# Altium PCB 圆度测量.PcbDoc
Units mil, origin at the board's own origin, x right, y up, seen from the top; angles counter-clockwise.
Board outline 5255.03 x 3665.03 mil, 2 copper layers (Top Layer, Bottom Layer); 81 components, 59 nets, 335 pads, 46 vias.
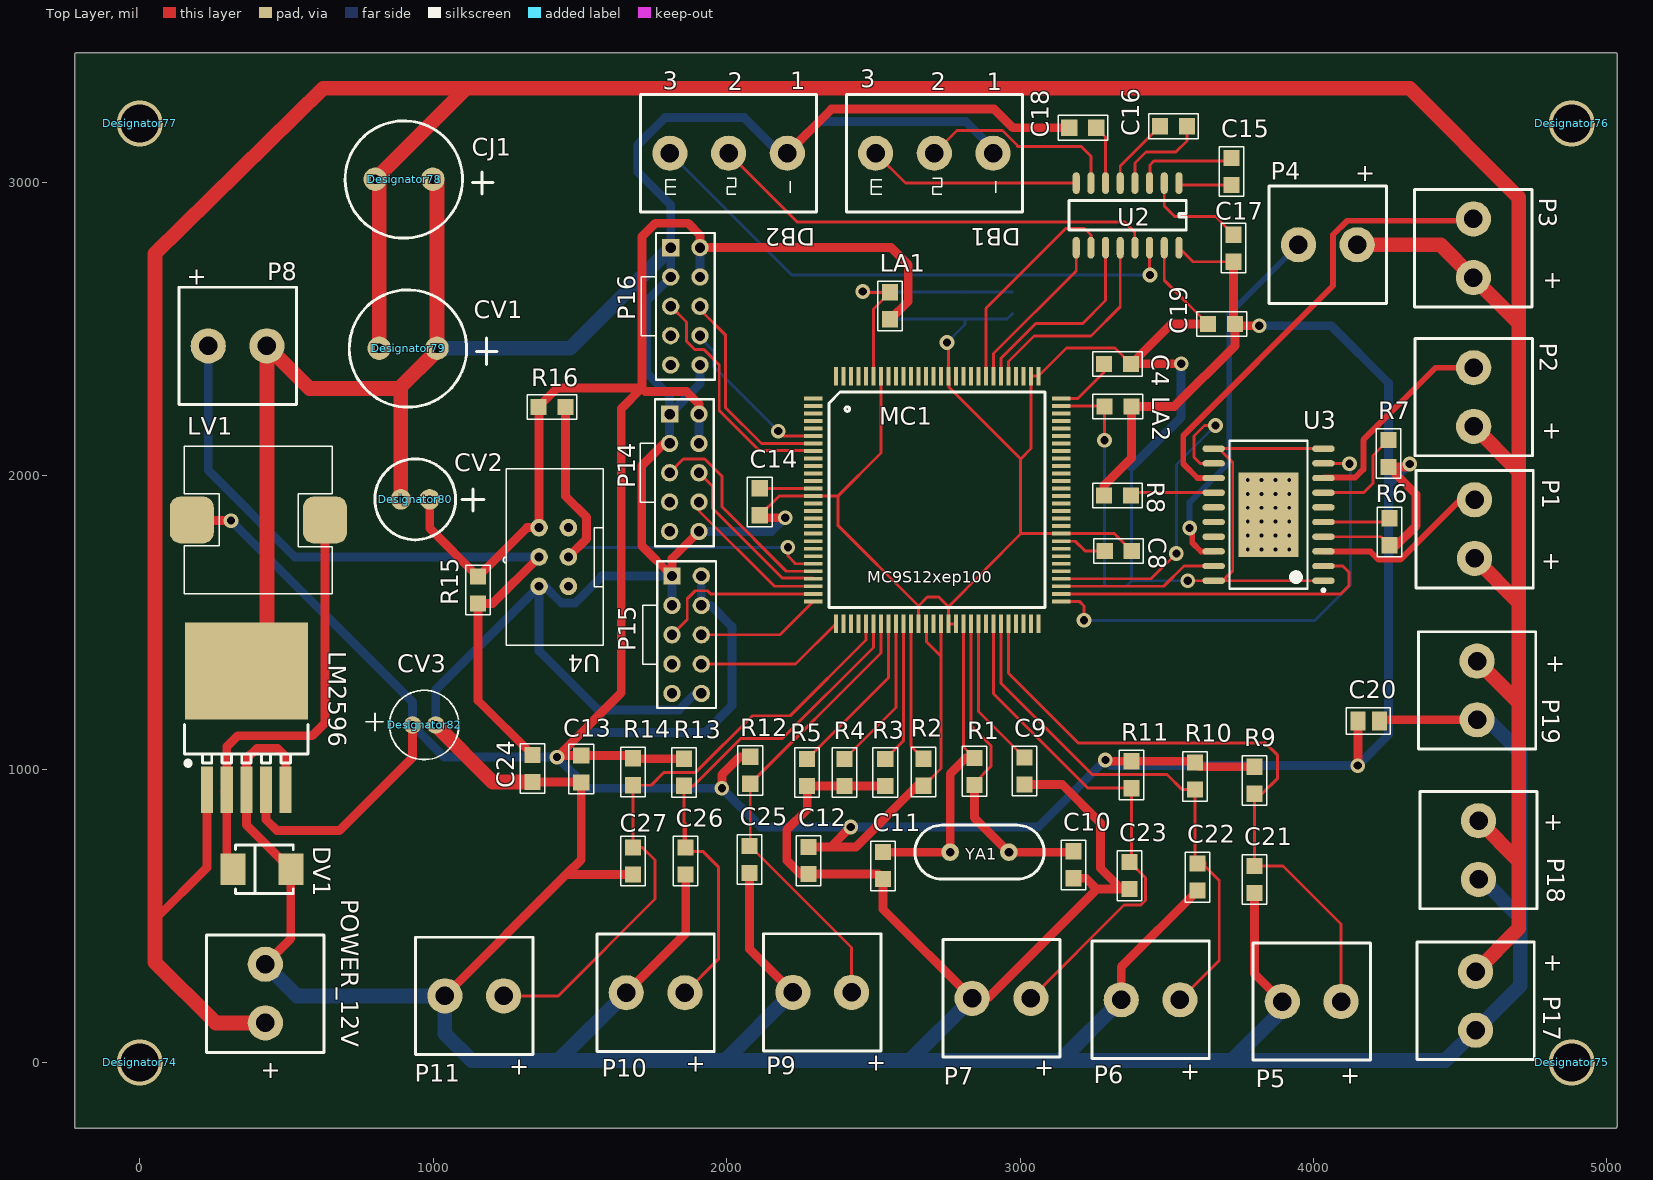
[diagram p0: Top Layer view]
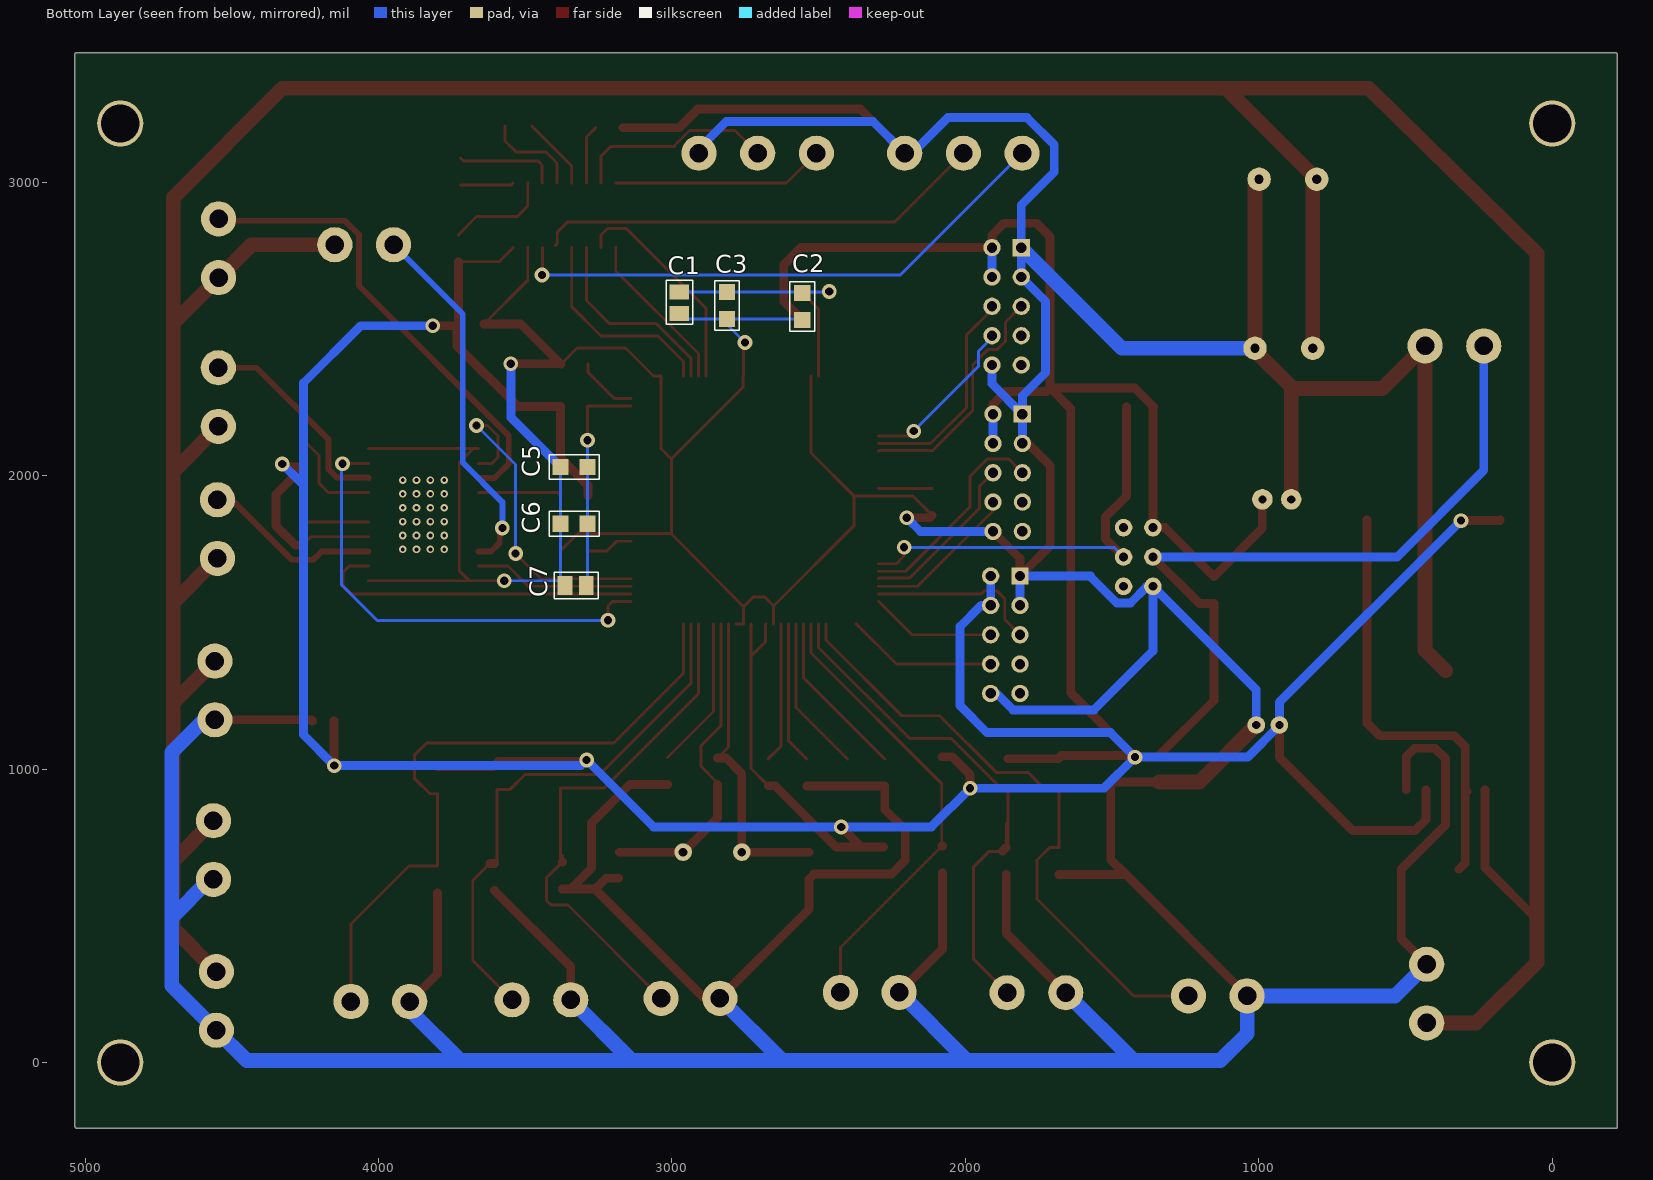
[diagram p1: Bottom Layer view, seen from below]

## Layer stack, top to bottom
Top Layer: signal copper 1.4
Dielectric: dielectric 12.6, FR-4, Dk 4.8
Bottom Layer: signal copper 1.4

## Board outline
-220.67,-222.39 ccw(c-218.16,-222.39) -218.16,-224.9 5028.84,-224.9 ccw(c5028.84,-222.39) 5031.36,-222.39 ccw(c5028.84,-222.39) 5031.3,-221.84 ccw(c5031.84,-219.39) 5034.36,-219.39 5034.36,3437.61 ccw(c5031.84,3437.61) 5031.84,3440.13 -218.16,3440.13 ccw(c-218.16,3437.61) -220.67,3437.61

## Design rules (kind name [scope] priority, off if disabled: settings)
Clearance [All] p1: gap=12
HoleSize [All] p1: absolutevalues=TRUE maxlimit=150 minlimit=1 maxpercent=80.000 minpercent=20.000
MinimumSolderMaskSliver [All] p1: minsoldermaskwidth=1
PolygonConnect [All] p1: connectstyle=Relief reliefconductorwidth=10 reliefentries=4 polygonreliefangle="90 Angle"
RoutingVias [All] p1: holewidth=28 width=40 viastyle="Through Hole" minholewidth=10 minwidth=20 maxholewidth=50 maxwidth=70
ShortCircuit [All] p1: allowed=TRUE
SilkToSilkClearance [All] p1: silktosilkclearance=1
SilkscreenOverComponentPads [All] p1: minsilkscreentomaskgap=0
SolderMaskExpansion [All] p1: expansion=4
Width [All] p1: maxlimit=50 minlimit=10 preferedwidth=10
23 further rules are at their usual default settings.

## Classes and differential pairs
component class SHEET1-胡晓: C1 C2 C3 C4 C5 C6 C7 C8 C9 C10 C11 C12 C13 C14 C15 C16 C17 C18 C19 C20 C21 C22 C23 C24 C25 C26 C27 DB1 DB2 DV1 LA1 LA2 LM2596 LV1 MC1 P1 P2 P3 P4 P5 P6 P7 P8 P9 P10 P11 P14 P15 P16 P17 P18 P19 POWER_12V R1 R2 R3 R4 R5 R6 R7 R8 R9 R11 R12 R13 R14 R15 R16 U2 U3 U4 YA1

## Components (designator, comment, footprint, x,y, rotation, side; value= is the part's Value field where it differs from the comment)
C1 "CA14" LC0805-有方向的电容 2974.84,2625.61 r270 bottom
C2 "CA13" 0805 2555.84,2622.61 r180 bottom
C3 "CA12" 0805 2812.46,2533.77 r0 bottom
C4 "CA11" 0805 3378.46,2379.77 r270 top
C5 "CA8" 0805 3379.46,2028.77 r90 bottom
C6 "CA9" 0805 3379.46,1835.77 r90 bottom
C7 "CA10" LC0805-有方向的电容 3291.84,1625.61 r0 bottom
C8 "CA7" 0805 3288.84,1742.61 r90 top
C9 "CA6" 0805 3014.84,1039.61 r0 top
C10 "CA5" 0805 3181.84,719.61 r0 top
C11 "CA4" 0805 2532.84,716.61 r0 top
C12 "CA3" 0805 2278.46,733.77 r0 top
C13 "CA2" 0805 1504.46,953.77 r180 top
C14 "CA1" 0805 2112.84,1956.61 r0 top
C15 "104" 0805 3720.84,3082.61 r0 top
C16 "104" 0805 3476.84,3190.61 r90 top
C17 "104" 0805 3727.84,2728.61 r180 top
C18 "104" 0805 3167.84,3185.61 r90 top
C19 "104" 0805 3640.84,2516.61 r90 top
C20 "C20" LC0805-有方向的电容 4151.84,1163.61 r0 top
C21 "0.1uF" 0805 3798.84,669.61 r0 top
C22 "0.1uF" 0805 3604.84,677.61 r0 top
C23 "0.1uF" 0805 3372.84,682.61 r0 top
C24 "Cap" 0805 1338.84,1047.61 r0 top
C25 "0.1uF" 0805 2078.46,737.77 r0 top
C26 "0.1uF" 0805 1860.46,732.77 r0 top
C27 "0.1uF" 0805 1680.46,732.77 r0 top
DB1 "DB1" kf128-3P 2907.84,3098.61 r180 top
DB2 "DB2" kf128-3P 2206.84,3098.61 r180 top
Designator74 "Comment" 穿孔#1 -3.16,3.61 r180 top
Designator75 "Comment" 穿孔#2 4878.84,-35.39 r180 top
Designator76 "Comment" 穿孔#3 4819.84,3195.61 r180 top
Designator77 "Comment" 穿孔#4 -5.16,3195.61 r180 top
Designator78 "Comment" 50V/330uF 999,3010 r270 top
Designator79 "Comment" 470uF 1013,2434 r270 top
Designator80 "Comment" 10V/330uF 963,1929 r270 top
Designator82 "Comment" 35V/10uF 970,1150 r90 top
DV1 "Diode" SMB-二极管 319.84,663.61 r0 top
LA1 "LA2" 0805 2556.84,2624.61 r0 top
LA2 "LA1" 0805 3379.46,2235.77 r270 top
LM2596 "LM2596_5" LM2596 363.46,1334.77 r270 top
LV1 "Inductor" 47uH 177.46,1848.77 r0 top
MC1 "UA1" mc9s12xep100 2709.46,1926.77 r0 top
P1 "LED1" KF128-2p 4548.84,1717.61 r90 top
P2 "LED2" KF128-2p 4545.84,2167.61 r90 top
P3 "LED3" KF128-2p 4544.84,2674.61 r90 top
P4 "蜂鸣器" KF128-2p 4148.84,2786.61 r180 top
P5 "按键" KF128-2p 3893.84,207.61 r0 top
P6 "按键" KF128-2p 3344.84,213.61 r0 top
P7 "按键" KF128-2p 2836.84,218.61 r0 top
P8 "复位开关" KF128-2p 233.46,2441.77 r0 top
P9 "中断" KF128-2p 2225.84,238.61 r0 top
P10 "中断" KF128-2p 1657.84,237.61 r0 top
P11 "中断" KF128-2p 1039.84,226.61 r0 top
P14 "Header 5X2" 插针5x5 1805.84,2209.61 r0 top
P15 "Header 5X2" 插针5x5 1813.84,1657.61 r0 top
P16 "Header 5X2" 插针5x5 1809.46,2776.77 r0 top
P17 "12V供电" KF128-2p 4552.46,109.77 r90 top
P18 "12V供电" KF128-2p 4562.46,623.77 r90 top
P19 "12V供电" KF128-2p 4557.46,1167.77 r90 top
POWER_12V "Header 2" KF128-2p 427.84,334.61 r270 top
R1 "RA8" 0805 2844.46,945.77 r180 top
R2 "RA2" 0805 2671.46,942.77 r180 top
R3 "RA2" 0805 2540.46,941.77 r180 top
R4 "RA2" 0805 2401.46,941.77 r180 top
R5 "RA2" 0805 2274.46,941.77 r180 top
R6 "10K" 0805 4258.84,1854.61 r0 top
R7 "10K" 0805 4255.84,2121.61 r0 top
R8 "10K" 0805 3285.84,1931.61 r90 top
R9 "10K" 0805 3798.84,1007.61 r0 top
R10 "10K" 0805 3595.84,1021.61 r0 top
R11 "10K" 0805 3379.84,1026.61 r0 top
R12 "10K" 0805 2080.46,1041.77 r0 top
R13 "10K" 0805 1854.46,1034.77 r0 top
R14 "10K" 0805 1681.46,1036.77 r0 top
R15 "Res2" 0805 1152.84,1563.61 r180 top
R16 "Res2" 0805 1358.84,2233.61 r90 top
U2 "MAX3232C" MAX232 3541.46,2996.77 r0 top
U3 "TLE8104" TEL8104 4033.84,1641.61 r180 top
U4 "BDM" BDM 1460.84,1622.61 r270 top
YA1 "YA1" XTAL 2733.84,716.61 r0 top

## Footprints (in the part's own frame and the unit in brackets; to place one, negate y for a bottom-side part, rotate by r counter-clockwise, add the part's x,y. Pads: shape width x height; smd on the part's side, far side on the other; paste and mask are expansions set on the pad)
10V/330uF [mil]
  round 70 hole 27.56: 1(10,25) 2(10,-73.43)
  silkscreen extent -128,-162 148,210
35V/10uF [mil]
  round 60 hole 27.56: 1(0,40) 2(0,-38.74)
  silkscreen extent -118,-117 118,200
47uH [mil]
  rrect50% 150x160.48 smd mask+0: 0(0,0) 1(454.09,0)
  silkscreen extent -25,-252 479,252
50V/330uF [mil]
  round 80 hole 31.5: 1(0,0) 2(0,-196.85)
  silkscreen extent -199,-299 201,205
470uF [mil]
  round 80 hole 31.5: 1(0,0) 2(0,-196.85)
  silkscreen extent -199,-299 201,205
0805 [mil]
  rect 55x55 smd: 1(0,-92) 2(0,0)
  silkscreen extent -42,-131 42,38
BDM [mil]
  round 60 hole 30: 1(0,0) 2(0,-100) 3(-100,0) 4(-100,-100) 5(-200,0) 6(-200,-100)
  silkscreen extent -400,-222 200,118
KF128-2p [mil]
  round 120 hole 62.99: 1(0,0) 2(200,0)
  silkscreen extent -100,-200 300,200
kf128-3P [mil]
  round 120 hole 62.99: 1(0,0) 2(200,0) 3(400,0)
  silkscreen extent -100,-200 500,200
LC0805-有方向的电容 [mm]
  rect 1.287x1.673 smd: 1(0,0) 2(1.85,0)
  silkscreen extent -1.02,-1.14 2.79,1.14
LM2596 [mm]
  rect 8.4x10.65 smd: 0(0,0)
  rect 4x1.05 smd: 1(10.3,-3.4) 2(10.3,-1.7) 3(10.3,0) 4(10.3,1.7) 5(10.3,3.4)
  silkscreen extent 4.65,-5.35 8.2,5.35
MAX232 [mil]
  oval 24x74 smd: 1(0,0) 2(-50,0) 3(-100,0) 4(-150,0) 5(-200,0) 6(-250,0) 7(-300,0) 8(-350,0) 9(-350,-220) 10(-300,-220) 11(-250,-220) 12(-200,-220) 13(-150,-220) 14(-100,-220) 15(-50,-220) 16(0,-220)
  silkscreen extent -375,-160 25,-60
mc9s12xep100 [mm]
  rect 1.6x0.34 smd: 1(-10.511,8.528) 2(-10.511,7.878) 3(-10.511,7.228) 4(-10.511,6.578) 5(-10.511,5.928) 6(-10.511,5.278) 7(-10.511,4.628) 8(-10.511,3.978) 9(-10.511,3.328) 10(-10.511,2.678) 11(-10.511,2.028) 12(-10.511,1.378) 13(-10.511,0.728) 14(-10.511,0.078) 15(-10.511,-0.572) 16(-10.511,-1.222) 17(-10.511,-1.872) 18(-10.511,-2.522) 19(-10.511,-3.172) 20(-10.511,-3.822) 21(-10.511,-4.472) 22(-10.511,-5.122) 23(-10.511,-5.772) 24(-10.511,-6.422) 25(-10.511,-7.072) 26(-10.511,-7.722) 27(-10.511,-8.372) 28(-10.511,-9.022) 57(10.939,-9.022) 58(10.939,-8.372) 59(10.939,-7.722) 60(10.939,-7.072) 61(10.939,-6.422) 62(10.939,-5.772) 63(10.939,-5.122) 64(10.939,-4.472) 65(10.939,-3.822) 66(10.939,-3.172) 67(10.939,-2.522) 68(10.939,-1.872) 69(10.939,-1.222) 70(10.939,-0.572) 71(10.939,0.078) 72(10.939,0.728) 73(10.939,1.378) 74(10.939,2.028) 75(10.939,2.678) 76(10.939,3.328) 77(10.939,3.978) 78(10.939,4.628) 79(10.939,5.278) 80(10.939,5.928) 81(10.939,6.578) 82(10.939,7.228) 83(10.939,7.878) 84(10.939,8.528)
  rect 0.34x1.6 smd: 29(-8.561,-10.972) 30(-7.911,-10.972) 31(-7.261,-10.972) 32(-6.611,-10.972) 33(-5.961,-10.972) 34(-5.311,-10.972) 35(-4.661,-10.972) 36(-4.011,-10.972) 37(-3.361,-10.972) 38(-2.711,-10.972) 39(-2.061,-10.972) 40(-1.411,-10.972) 41(-0.761,-10.972) 42(-0.111,-10.972) 43(0.539,-10.972) 44(1.189,-10.972) 45(1.839,-10.972) 46(2.489,-10.972) 47(3.139,-10.972) 48(3.789,-10.972) 49(4.439,-10.972) 50(5.089,-10.972) 51(5.739,-10.972) 52(6.389,-10.972) 53(7.039,-10.972) 54(7.689,-10.972) 55(8.339,-10.972) 56(8.989,-10.972) 85(8.989,10.478) 86(8.339,10.478) 87(7.689,10.478) 88(7.039,10.478) 89(6.389,10.478) 90(5.739,10.478) 91(5.089,10.478) 92(4.439,10.478) 93(3.789,10.478) 94(3.139,10.478) 95(2.489,10.478) 96(1.839,10.478) 97(1.189,10.478) 98(0.539,10.478) 99(-0.111,10.478) 100(-0.761,10.478) 101(-1.411,10.478) 102(-2.061,10.478) 103(-2.711,10.478) 104(-3.361,10.478) 105(-4.011,10.478) 106(-4.661,10.478) 107(-5.311,10.478) 108(-5.961,10.478) 109(-6.611,10.478) 110(-7.261,10.478) 111(-7.911,10.478) 112(-8.561,10.478)
  silkscreen extent -9.14,-9.55 9.55,9.09
SMB-二极管 [mil]
  rect 85x107.99 smd: 1(195,-5) 2(-1.85,-5)
  silkscreen extent 6,-88 203,78
TEL8104 [mm]
  oval 1.95x0.55 smd: 1(0,0) 2(0,-1.27) 3(0,-2.54) 4(0,-3.81) 5(0,-5.08) 6(0,-6.35) 7(0,-7.62) 8(0,-8.89) 9(0,-10.16) 10(0,-11.43) 11(9.5,-11.43) 12(9.5,-10.16) 13(9.5,-8.89) 14(9.5,-7.62) 15(9.5,-6.35) 16(9.5,-5.08) 17(9.5,-3.81) 18(9.5,-2.54) 19(9.5,-1.27) 20(9.5,0)
  rect 5.2x7.3 smd: 21(4.75,-5.715)
  silkscreen extent -0.13,-12.11 8.13,0.95, body extent 0.95,-12.11 8.55,0.68, height 2.55
XTAL [mil]
  round 60 hole 30: 1(28,0) 2(228,0)
  silkscreen extent -92,-92 348,92
插针5x5 [mm]
  rect 1.5x1.5 hole 0.9: 1(0,0)
  round 1.5 hole 0.9: 2(2.54,0) 3(0,-2.54) 4(2.54,-2.54) 5(0,-5.08) 6(2.54,-5.08) 7(0,-7.62) 8(2.54,-7.62) 9(0,-10.16) 10(2.54,-10.16)
  silkscreen extent -2.54,-11.43 3.81,1.27
穿孔#1 [mm]
  round 4 hole 3.3: 1(-0.08,0.092)
穿孔#2 [mm]
  round 4 hole 3.3: 1(-0.029,-0.899)
穿孔#3 [mm]
  round 4 hole 3.3: 1(-1.528,-0.111)
穿孔#4 [mm]
  round 4 hole 3.3: 1(-0.131,-0.111)

## Via types
v1: diameter 25.98, hole 12.99, Top Layer to Bottom Layer, tented top, 24 vias
v2: diameter 50, hole 28, Top Layer to Bottom Layer, 22 vias

## Nets (pads, with @x,y where several pads share a name; then routed paths per layer and width w, separated by ;. In a path a pad name is that pad's centre, name@x,y a point inside that pad or via, vN(x,y) a via of type N, cw(c..) or ccw(c..) an arc to the next point about the centre after c; other vN are vias at no path point)
5V: C12.2 C13.1 C17.2 C19.1 C20.1 Designator80.1 Designator82.1 LA1.1 LA2.2 LM2596.4 LV1.0 MC1.41 MC1.43 P14.2 P14.4 P15.2 P15.4 P16.2 P16.4 R2.2 R6.1 R7.1 R8.2 R9.2 R10.2 R11.2 R12.2 R13.2 R14.2 R15.1 R16.2 U2.16 U3.4 U4.6 | length 18084.3
  Top Layer w10: R2.2@2671.46,949.77 R2.2 2730.66,1001.98 MC1.43 MC1.43@2728.77,1492.91 ; MC1.41 2681.38,1492.9 2681.38,1433.62 2730.66,1384.34 ; U2.16 3589.61,2728.61 C17.2 ; U3.4 4229.84,1791.61 R6.1
  Top Layer w30: LV1.0 179.61,1846.61 v2(310.84,1846.61) ; LM2596.4 430.39,827.61 468,790 680,790 930,1040 Designator82.1 ; Designator80.1 988,1820.46 R15.1 1319.84,1822.61 U4.6 1360.84,2231.61 R16.2 1358.84,2234.8 1422.66,2298.61 1711.31,2298.61 ; v2(1421.84,1040.61) v2@1427,1045.77 ; R13.2 1683.46,1034.77 R14.2 1672.46,1045.77 C13.1 v2@1427,1045.77 ; P14.2 1905.84,2243.61 1862.84,2286.61 1723.31,2286.61 1711.31,2298.61 ; v2(1983.84,934.61) 1983.84,980.61 2045,1041.77 R12.2 ; C12.2 2354,733.77 ; v2(2422.84,802.61) 2354,733.77 ; LA1.1 2558.03,2532.61 2618.84,2593.43 2618.84,2718.61 2560.68,2776.77 P16.2 1909.46,2819 1868.84,2859.61 1756.84,2859.61 1711.31,2814.09 1711.31,2298.61 ; R2.2 2649,942.77 2440,733.77 2354,733.77 ; R8.2 3285.84,1965.61 3379.46,2059.23 LA2.2 3526,2235.77 3732.84,2442.61 C19.1 ; v2(3290.84,1030.61) 3294.84,1026.61 R11.2 3590.84,1026.61 R10.2 3609.84,1007.61 R9.2 ; C17.2 3727.84,2521.61 C19.1 ; v2(3814.84,2510.61) 3738.84,2510.61 C19.1 ; v2(4150.84,1011.61) 4151.84,1012.61 C20.1 ; R7.1 4317.84,2029.61 v2(4327.84,2039.61) ; R6.1 4282.84,1762.61 4349.84,1829.61 4349.84,1935.61 R7.1@4258.84,2026.61 ; v2@1427,1045.77 1640.84,1259.61 1640.84,2228.14 1711.31,2298.61
  Bottom Layer w30: v2(310.84,1846.61) 930,1227.46 Designator82.1 930,1148.13 1037.52,1040.61 v2(1421.84,1040.61) ; P14.4 P14.2 ; P16.4 P16.2 ; P15.2 P15.4 1945.84,1557.61 2017.84,1485.61 2017.84,1215.61 1926.84,1124.61 1505.84,1124.61 v2(1421.84,1040.61) ; v2(3814.84,2510.61) 4060.84,2510.61 4255.84,2315.61 4255.84,1978.61 ; v2(4327.84,2039.61) 4266.84,1978.61 4255.84,1978.61 ; v2(1421.84,1040.61) 1527.84,934.61 v2(1983.84,934.61) 2115.84,802.61 v2(2422.84,802.61) 3062.84,802.61 v2(3290.84,1030.61) 3309.84,1011.61 v2(4150.84,1011.61) 4255.84,1116.61 4255.84,1978.61
12V: Designator78.2 Designator79.2 LM2596.1 P1.1 P2.1 P3.1 P4.1 P17.2 P18.2 P19.2 POWER_12V.2 | length 13701.9
  Top Layer w30: 51.84,487 229.6,664.76 LM2596.1 ; P2.1 P2.1@4576.84,2167.61 ; P19.2 P19.2@4599.68,1367.77
  Top Layer w50: POWER_12V.2 258.84,134.61 51.84,341.61 51.84,487 51.84,2755.84 624.84,3319.61 1109,3319.61 ; Designator79.2 816.15,2996 Designator78.2 1109,3316.85 1109,3319.61 ; P4.1 4432.84,2786.61 P3.1 4699.84,2519.61 ; P2.1 4694.84,2018.61 4699.84,2018.61 ; P1.1 4699.84,1566.61 ; P17.2 4699.84,457.16 4699.84,686.39 ; P19.2 4699.84,1225.39 ; P18.2 4699.84,686.39 ; 1109,3319.61 4327.84,3319.61 4699.84,2947.61 4699.84,2519.61 ; 4699.84,686.39 4699.84,1225.39 ; 4699.84,1225.39 4699.84,1566.61 ; 4699.84,1566.61 4699.84,2018.61 ; 4699.84,2018.61 4699.84,2519.61
BKGD: MC1.23 R16.1 U4.3 | length 1455.8
  Top Layer w10: v2(2208.84,1755.61) 2208.84,1725.61 2234.93,1699.53 MC1.23
  Top Layer w30: R16.1 1450.84,1929.61 1522.84,1857.61 1522.84,1784.61 U4.3
  Bottom Layer w10: U4.3 1493.84,1755.61 v2(2208.84,1755.61)
GND: C1.2 C2.1 C3.2 C4.2 C5.2 C6.2 C7.2 C8.1 C9.1 C10.1 C11.1 C12.1 C13.2 C14.1 C18.2 C19.2 C20.2 C21.1 C22.1 C23.1 C24.1 C25.1 C26.1 C27.1 DB1.1 DB2.1 Designator78.1 Designator79.1 Designator80.2 Designator82.2 DV1.1 LM2596.0 LM2596.3 LM2596.5 MC1.14 MC1.40 MC1.44 MC1.45 MC1.66 MC1.85 MC1.86 MC1.97 MC1.106 P5.1 P6.1 P7.1 P8.2 P9.1 P10.1 P11.1 P14.1 P14.3 P14.10 P15.1 P15.3 P15.10 P16.1 P16.3 P16.10 P17.1 P18.1 P19.1 POWER_12V.1 R3.2 R4.2 R5.2 U2.15 U3.1 U3.10 U3.11 U3.20 U4.2 | length 33440.3
  Top Layer w10: C13.2@1502.61,955.61 C13.2 ; C14.1 2178.07,1929.84 MC1.14 2379.07,1929.84 ; MC1.106 2525.94,2076.71 2379.07,1929.84 ; MC1.40 2653.89,1555.89 ; v2@2742.84,2453.61 2756.25,2440.2 MC1.97 2758.15,2337.4 2758.15,2300.76 3002.24,2056.67 ; MC1.45 MC1.44 2756.25,1552.75 ; P7.1 P7.1@2889.84,218.61 ; 3001.18,1800.83 2756.25,1552.75 ; C4.2 3323.61,2434.61 3158.66,2434.61 MC1.85 MC1.86 3037.75,2092.18 3002.24,2056.67 ; C8.1 3321.57,1801.89 MC1.66 3002.24,1801.89 3002.24,2056.67 ; U2.15 3491.46,2666 C19.2 ; v2(3571.84,1641.61) U3.20 ; U3.11 U3.11@3677.84,2091.61 ; U3.1 U3.20 ; U3.10 U3.11@3677.84,2091.61 ; 2379.07,1929.84 2379.07,1830.71 2653.89,1555.89 ; 2653.89,1555.89 2684,1586 2723,1586 2756.25,1552.75 ; U3.20 3690.84,1641.61 3724.84,1675.61 3724.84,2044.61 U3.11@3677.84,2091.61
  Top Layer w30: POWER_12V.1 514.84,421.61 DV1.1 363.46,810 LM2596.3 363.46,1034.46 400,1071 469,1071 497.31,1042.69 LM2596.5 ; P8.2@433.46,2404.15 P8.2 ; P11.1 1454,640.77 ; C24.1 C13.2@1502.61,955.61 ; C13.2 1504.46,691.23 1454,640.77 ; P10.1 1860.46,440.23 C26.1 ; C27.1 1454,640.77 ; P14.3 1786.84,2109.61 1710.84,2033.61 1710.84,1760.61 P15.1 1813.84,1717.61 P14.10 ; C25.1 2078.46,386 P9.1 ; C14.1 2120.84,1856.61 v2(2199.84,1856.61) ; DB2.1 2357.23,3249 2911.61,3249 2974.99,3185.61 C18.2 ; R3.2 R4.2 R5.2 2274.46,862.23 2204.84,792.61 2204.84,688.61 2251.68,641.77 C12.1 2515.68,641.77 C11.1 2532.84,522.61 P7.1 P7.1@2796.84,218.61 ; v2@2742.84,2453.61 v2(2750.84,2453.61) ; P7.1@2889.84,218.61 3261.84,590.61 ; C9.1 3142.84,947.61 3273.84,816.61 3273.84,662.61 3345.84,590.61 C23.1 3261.84,590.61 ; C10.1 3224.84,627.61 3261.84,590.61 ; P6.1 3344.84,325.61 C22.1 ; C4.2 C4.2@3379.68,2381 ; v2(3549,2381) C4.2@3379.68,2381 ; C19.2 3515.3,2516.61 C4.2@3379.68,2381 ; C21.1 3798.84,302.61 P5.1 ; C20.2 4228.83,1167.77 P19.1 P19.1@4593.68,1167.77 ; P18.1 P18.1@4574.68,623.77
  Top Layer w50: LM2596.0 433.46,1404.77 P8.2@433.46,2404.15 ; P8.2 578.23,2297 884,2297 ; Designator80.2 889.57,2291.43 884,2297 ; Designator78.1 1013,2996 Designator79.1 1013,2426 884,2297 ; Designator82.2 1203.13,955.61 C24.1
  Bottom Layer w10: C2.1 2559,2533.77 C3.2 ; v2@2742.84,2453.61 v2(2750.84,2453.61) 2812.46,2515.23 C3.2 ; C1.2 2955.83,2533.77 C3.2 ; P6.1@3314.84,213.61 P6.1 ; C7.2 C7.2@3379.46,1640.39 ; C5.2 C6.2 C7.2@3379.46,1640.39 ; v2(3571.84,1641.61) 3380.68,1641.61 C7.2@3379.46,1640.39
  Bottom Layer w30: Designator82.2 1008.74,1270.51 U4.2 ; U4.2@1380.23,1622.61 1437.23,1565.61 1484.45,1565.61 1573.62,1654.79 1573.62,1657.61 P15.1 P15.3 ; U4.2@1383.06,1622.61 U4.2 ; P14.3 P14.1 ; P14.10 2152.84,1809.61 v2(2199.84,1856.61) ; P16.10 1909.46,2313.23 P14.1 ; P15.10@1913.84,1242.61 P15.10 1893.78,1257.61 1837.26,1201.09 1561.91,1201.09 1360.84,1402.16 U4.2 ; 1996.84,6.61 1996.84,9.61 ; DB2.1@2206.84,3113.16 DB2.1 ; DB1.1 2907.84,3113.61 2814.84,3206.61 2314.84,3206.61 DB2.1 ; C5.2 3549,2198.31 v2(3549,2381) ; P5.1@3893.84,178.61 P5.1 ; P14.1 1805.84,2271.33 1726.84,2350.33 1726.84,2594.16 P16.3 P16.1 1809.46,2922 1697,3034.46 1697,3127 1790,3220 2060.23,3220 2181.61,3098.61 DB2.1
  Bottom Layer w50: POWER_12V.1 535.84,226.61 P11.1 1039.84,98.61 1131.84,6.61 1426.84,6.61 ; Designator79.1 1466.69,2434 P16.1 ; P10.1 1426.84,6.61 ; 1996.84,9.61 P9.1 ; P7.1 2624.84,6.61 ; P6.1 3137.84,6.61 ; P5.1@3893.84,178.61 3721.84,6.61 ; P18.1@4574.68,623.77 4704.84,493.61 ; P19.1@4593.68,1167.77 4704.84,1056.61 4704.84,493.61 ; 1426.84,6.61 1996.84,6.61 2624.84,6.61 ; 2624.84,6.61 3137.84,6.61 ; 3137.84,6.61 3721.84,6.61 ; 3721.84,6.61 4449.3,6.61 P17.1 4704.84,262.16 4704.84,493.61
KWH0: C21.2 MC1.52 P5.2 R9.1 | length 2268.3
  Top Layer w10: MC1.52 2960.98,1326.48 3198.34,1089.11 3832.34,1089.11 3833.84,1090.61 3877.84,1046.61 3877.84,968.61 3824.84,915.61 R9.1 C21.2 3895.84,669.61 4093.84,471.61 P5.2
KWH1: C22.2 MC1.51 P6.2 R10.1 | length 1828.6
  Top Layer w10: MC1.51 2935.39,1292.07 3245.84,981.61 3501.06,981.61 3553.06,929.61 R10.1 3595.84,686.61 C22.2 ; P6.2 3678.84,347.61 3678.84,619.61 C22.2@3620.84,677.61
  Top Layer w30: C22.2 C22.2@3620.84,677.61
KWH2: C23.2 MC1.50 P7.2 R11.1 | length 1801
  Top Layer w10: MC1.50 2909.8,1256.66 3231.84,934.61 R11.1 3379.84,689.61 C23.2 C23.2@3372.84,704.61 ; P7.2 3354.34,536.11 3411.53,536.11 3427.34,551.93 3427.34,629.3 C23.2@3374.03,682.61
  Top Layer w30: C23.2 C23.2@3374.03,682.61
KWH4: C25.2 MC1.35 P9.2 R12.1 | length 1586.1
  Top Layer w10: C25.2 2080.46,739.77 R12.1 2525.94,1395.25 MC1.35 ; C25.2@2079.64,737.77 2425.84,391.57 P9.2
  Top Layer w30: C25.2 C25.2@2079.64,737.77
KWH5: C26.2 MC1.34 P10.2 R13.1 | length 1831.5
  Top Layer w10: P10.2 1971.84,351.61 1971.84,666.61 1918.84,719.61 C26.2@1873.61,719.61 ; 1860.46,815 C26.2 1854.46,738.77 R13.1 1887,942.77 2047.84,1103.61 2189.84,1103.61 2500.35,1414.12 MC1.34
  Top Layer w30: C26.2 C26.2@1873.61,719.61
KWH6: C27.2 MC1.33 P11.2 R14.1 | length 2144.9
  Top Layer w10: P11.2 1425.84,226.61 1755.84,556.61 1755.84,689.61 1712.69,732.77 C27.2 1681.46,733.77 R14.1 1743,944.77 1786.84,988.61 1894.84,988.61 2087.84,1181.61 2216.84,1181.61 2474.76,1439.53 MC1.33
NetC1_1: C1.1 C2.2 C3.1 LA1.2 MC1.107 | length 916.7
  Top Layer w10: v2(2463.84,2627.61) 2466.84,2624.61 LA1.2 2500.35,2568.12 MC1.107
  Bottom Layer w10: v2(2463.84,2627.61) 2465.68,2625.77 C3.1 ; C3.1@2811.3,2624.61 C3.1 ; C1.1 2812.3,2625.61 C3.1
NetC4_1: C4.1 MC1.84 | length 211
  Top Layer w10: MC1.84 3196.75,2262.52 3286.46,2352.23 C4.1
NetC5_1: C5.1 C6.1 C7.1 LA2.1 MC1.83 | length 760.1
  Top Layer w10: MC1.83 3286.3,2236.93 LA2.1 3287.46,2121 v2(3287.84,2120.61)
  Bottom Layer w10: v2(3287.84,2120.61) 3287.46,2120.23 C5.1 C6.1 3287.46,1630 C7.1
NetC8_2: C8.2 MC1.65 | length 162.7
  Top Layer w10: MC1.65 3188.16,1776.3 3221.84,1742.61 C8.2
NetC9_2: C9.2 MC1.48 | length 519.9
  Top Layer w10: MC1.48 2858.61,1195.84 C9.2
NetC10_2: C10.2 MC1.47 R1.2 YA1.2 | length 1099.5
  Top Layer w10: MC1.47 2833.02,1147.43 2900.84,1079.61 2900.84,1009.16 2844.46,952.77 R1.2 ; C10.2@3178.84,716.61 C10.2
  Top Layer w30: R1.2 2844.46,834 YA1.2 C10.2@3178.84,716.61
NetC11_2: C11.2 MC1.46 R1.1 YA1.1 | length 1073.4
  Top Layer w10: MC1.46 2807.43,1074.79 R1.1
  Top Layer w30: C11.2 YA1.1 2761.84,983.61 2816,1037.77 R1.1
NetC14_2: C14.2 MC1.13 | length 183.3
  Top Layer w10: C14.2 2114.02,1955.43 MC1.13
NetC15_1: C15.1 U2.1 | length 181.9
  Top Layer w10: U2.1 3547.61,2990.61 C15.1
NetC15_2: C15.2 U2.3 | length 350.4
  Top Layer w10: U2.3 3442.84,2998.16 3442.84,3058.61 3455.84,3071.61 3709.84,3071.61 C15.2
NetC16_1: C16.1 U2.4 | length 327.1
  Top Layer w10: U2.4 3391.46,3065.23 3428.84,3102.61 3530.84,3102.61 3568.84,3140.61 C16.1
NetC16_2: C16.2 U2.5 | length 249.9
  Top Layer w10: U2.5 3341.46,3055.23 C16.2
NetC17_1: C17.1 U2.2 | length 355.5
  Top Layer w10: U2.2 3491.46,2918.61 3526.84,2883.23 3526.84,2882.61 3665.84,2882.61 C17.1
NetC18_1: C18.1 U2.6 | length 201.9
  Top Layer w10: C18.1 3291.46,3154 U2.6
NetDB1_22: DB1.2 U2.7 | length 695
  Top Layer w10: DB1.2 2784.84,3175.61 2939.74,3175.61 2990.91,3124.44 2990.91,3121.61 3208.46,3121.61 3241.46,3088.61 U2.7
NetDB1_23: DB1.3 U2.8 | length 725.8
  Top Layer w10: DB1.3 2609.68,2996.77 U2.8
NetDB2_22: DB2.2 U2.13 | length 1544.7
  Top Layer w10: DB2.2 2241.84,2863.61 3356.84,2863.61 3390.84,2829.61 3390.84,2790.57 U2.13@3398.05,2783.36
NetDB2_23: DB2.3 U2.14 | length 1901.6
  Top Layer w10: U2.14 3441.46,2685 v2(3442.84,2683.61)
  Bottom Layer w10: DB2.3 2221.84,2683.61 v2(3442.84,2683.61)
NetDV1_2: DV1.2 LM2596.2 LV1.1 | length 1496.1
  Top Layer w30: LM2596.2@289.84,922.58 LM2596.2 ; DV1.2 296.53,680.08 LM2596.2 ; LV1.1 631.55,1157.32 587.84,1113.61 333.84,1113.61 296.53,1076.3 LM2596.2
NetMC1_36: MC1.36 R5.1 | length 575.8
  Top Layer w10: R5.1 2551.53,1310.84 MC1.36
NetMC1_37: MC1.37 R4.1 | length 533.8
  Top Layer w10: R4.1 2577.12,1209.44 MC1.37
NetMC1_38: MC1.38 R3.1 | length 486.8
  Top Layer w10: R3.1 2602.71,1096.03 MC1.38
NetMC1_39: MC1.39 R2.1 | length 477.9
  Top Layer w10: MC1.39 2628.3,1077.93 R2.1
NetR6_2: R6.2 U3.5 | length 230.4
  Top Layer w10: U3.5 4245.84,1841.61 R6.2
NetR7_2: R7.2 U3.7 | length 352.2
  Top Layer w10: U3.7 4170.84,1941.61 4202.84,1973.61 4202.84,2068.61 R7.2
NetR8_1: R8.1 U3.14 | length 286.1
  Top Layer w10: R8.1 3387.84,1941.61 U3.14
OUT1: P1.2 U3.3 | length 611.5
  Top Layer w10: P1.2@4528.84,1917.61 P1.2
  Top Layer w20: U3.3 4193.73,1741.61 4222.23,1713.11 4295.46,1713.11 4499.96,1917.61 P1.2@4528.84,1917.61
OUT2: P2.2 U3.8 | length 726.7
  Top Layer w20: U3.8 4035.84,1993.61 4142.31,1993.61 4169.84,2021.15 4169.84,2121.73 4415.73,2367.61 P2.2
OUT3: P3.2 U3.13 | length 1616.4
  Top Layer w20: U3.13 3604.39,1991.61 3556,2040 3556,2135.96 4066.84,2646.8 4066.84,2820.58 4114.88,2868.61 4538.84,2868.61 P3.2
OUT4: P4.2 U3.18 | length 1282.1
  Top Layer w10: v2(3577.84,1821.61) v2@3586.84,1812.61
  Top Layer w20: v2@3586.84,1812.61 3586.84,1771.16 3616.39,1741.61 U3.18
  Bottom Layer w10: P4.2@3948.84,2762.61 P4.2
  Bottom Layer w20: v2(3577.84,1821.61) 3577.84,1909.43 3712.84,2044.43 3712.84,2550.61 P4.2
PA0: MC1.57 U3.9 | length 1596.5
  Top Layer w10: MC1.57 MC1.57 ; MC1.57@3141.07,1570.61 MC1.57 ; v2(3217.84,1506.61) 3217.84,1555.61 3201.88,1571.58 MC1.57 ; U3.9 4034.84,2040.61 v2(4122.84,2040.61)
  Bottom Layer w10: v2(3217.84,1506.61) 4004.84,1506.61 4125.84,1627.61 4125.84,2037.61 v2(4122.84,2040.61)
PA1: MC1.58 U3.2 | length 1133.8
  Top Layer w10: MC1.58 4093.39,1597.17 4120.84,1624.61 4120.84,1670.61 4099.84,1691.61 U3.2
PA2: MC1.59 U3.19 | length 548.2
  Top Layer w10: MC1.59 3489.98,1622.76 3558.84,1691.61 U3.19
PA3: MC1.60 U3.12 | length 1155.1
  Top Layer w10: MC1.60 3446.58,1648.35 v2(3532.84,1734.61) ; U3.12 3613.84,2041.61 3592.84,2062.61 3592.84,2134.61 3628.84,2170.61 v2(3665.84,2170.61)
  Bottom Layer w10: v2(3532.84,1734.61) 3532.84,2037.61 v2(3665.84,2170.61)
PB0: MC1.24 P14.5 | length 728.2
  Top Layer w10: P14.5 1852.37,2056.14 1925.11,2056.14 1984.84,1996.41 1984.84,1892.61 2203.52,1673.94 MC1.24
PB1: MC1.25 P14.6 | length 584.3
  Top Layer w10: P14.6 1952.37,1963.09 1952.37,1890.34 1951.24,1889.21 2190.21,1650.24 2293.72,1650.24 MC1.25
PB2: MC1.26 P14.8 | length 526.2
  Top Layer w10: P14.8 1905.84,1879.61 2162.7,1622.76 MC1.26
PB3: MC1.27 P15.5 | length 589.8
  Top Layer w10: P15.5 1865.84,1509.61 1865.84,1580.61 1892.84,1607.61 1934.88,1607.61 1945.33,1597.17 MC1.27
PB4: MC1.28 P15.6 | length 429
  Top Layer w10: P15.6 2181.66,1457.61 MC1.28
PB5: MC1.29 P15.8 | length 515.4
  Top Layer w10: P15.8 2235.21,1357.61 MC1.29
PK0: MC1.8 P16.5 | length 827.5
  Top Layer w10: P16.5@1809.46,2569.55 P16.5 1862.93,2523.3 1862.93,2457.5 1890.18,2430.24 1921.78,2430.24 1974.84,2377.19 1974.84,2221.5 2111.06,2085.28 2293.73,2085.28 MC1.8
PK1: MC1.7 P16.6 | length 731.5
  Top Layer w10: P16.6 1909.46,2565.83 1996.84,2478.44 1996.84,2230.61 2118.48,2108.98 MC1.7
PK2: MC1.6 P16.8 | length 566.3
  Top Layer w10: v2(2175.84,2151.61) 2192.89,2134.57 MC1.6
  Bottom Layer w10: P16.8@1909.46,2465.83 P16.8@1909.46,2469.83 ; P16.8 P16.8@1909.46,2469.83 ; v2(2175.84,2151.61) 1955.98,2371.47 1955.98,2423.3 P16.8@1909.46,2469.83
R\E\S\E\T\: C24.2 P8.1 R15.2 U4.4 | length 2540.4
  Top Layer w30: C24.2 1152.84,1233.61 R15.2 1201.84,1563.61 U4.4
  Bottom Layer w30: P8.1 233.46,2018 528.84,1722.61 U4.4
RESET: MC1.42
RXD0: MC1.89 U2.12 | length 708.7
  Top Layer w10: MC1.89 2960.98,2388.75 3047.83,2475.6 3241.83,2475.6 3341.46,2575.23 U2.12
RXD1: MC1.91 U2.9 | length 554.1
  Top Layer w10: MC1.91 2909.8,2415.57 3191.46,2697.23 U2.9
TXD0: MC1.90 U2.11 | length 678.7
  Top Layer w10: MC1.90 2935.39,2400.16 3053.84,2518.61 3213.84,2518.61 3291.46,2596.23 U2.11
TXD1: MC1.92 U2.10 | length 752.6
  Top Layer w10: MC1.92 2884.21,2569.98 3155.84,2841.61 3219.84,2841.61 3241.46,2820 U2.10
pads on no net: Designator74.1 Designator75.1 Designator76.1 Designator77.1 MC1.1 MC1.2 MC1.3 MC1.4 MC1.5 MC1.9 MC1.10 MC1.11 MC1.12 MC1.15 MC1.16 MC1.17 MC1.18 MC1.19 MC1.20 MC1.21 MC1.22 MC1.30 MC1.31 MC1.32 MC1.49 MC1.53 MC1.54 MC1.55 MC1.56 MC1.61 MC1.62 MC1.63 MC1.64 MC1.67 MC1.68 MC1.69 MC1.70 MC1.71 MC1.72 MC1.73 MC1.74 MC1.75 MC1.76 MC1.77 MC1.78 MC1.79 MC1.80 MC1.81 MC1.82 MC1.87 MC1.88 MC1.93 MC1.94 MC1.95 MC1.96 MC1.98 MC1.99 MC1.100 MC1.101 MC1.102 MC1.103 MC1.104 MC1.105 MC1.108 MC1.109 MC1.110 MC1.111 MC1.112 P14.7 P14.9 P15.7 P15.9 P16.7 P16.9 U3.6 U3.15 U3.16 U3.17 U3.21 U4.1 U4.5
copper on no net:
  other v1: 3775.97,1748.5 3823.21,1748.5 3870.46,1748.5 3917.7,1748.5 3775.97,1795.75 3823.21,1795.75 3870.46,1795.75 3917.7,1795.75 3775.97,1842.99 3823.21,1842.99 3870.46,1842.99 3917.7,1842.99 3775.97,1890.24 3823.21,1890.24 3870.46,1890.24 3917.7,1890.24 3775.97,1937.48 3823.21,1937.48 3870.46,1937.48 3917.7,1937.48 3775.97,1984.72 3823.21,1984.72 3870.46,1984.72 3917.7,1984.72

## Silkscreen, mask and mechanical layers (free items; w line width, h text height)
Top Overlay:
  text "3" at 2456,3323 h60
  text "3" at 1783,3317 h60
  text "1" at 2217,3317 h60
  text "2" at 2004,3314 h60
  text "2" at 2696,3314 h60
  text "1" at 2887,3314 h60
  text "CJ1" at 1132,3090 h60
  text "+" at 4142,3003 h60
  text "+" at 160,2651 h60
  text "+" at 4781,2638 h60
  text "CV1" at 1138,2537 h60
  text "+" at 4778,2125 h60
  text "CV2" at 1071,2014 h60
  text "+" at 4777,1681 h60
  text "+" at 4790,1332 h60
  text "CV3" at 878,1329 h60
  text "+" at 4783,792 h60
  text "+" at 4782,312 h60
  text "+" at 2476,-29 h60
  text "+" at 1861,-31 h60
  text "+" at 1260,-42 h60
  text "+" at 3048,-46 h60
  text "+" at 412,-54 h60
  text "+" at 3546,-59 h60
  text "+" at 4091,-72 h60
Mechanical 1:
  lines w5: -218.16,-222.39 -218.16,3437.61 5031.84,3437.61 5031.84,-219.39 5028.84,-222.39 -218.16,-222.39

## Text inside footprints (layer, text, board x,y; h text height)
MC1: Top Overlay "MC9S12xep100" at 2478.46,1634.77 h40